# Altium PCB Voltage_Controll.PcbDoc
Units mil, origin at the board's own origin, x right, y up, seen from the top; angles counter-clockwise.
Board outline 780 x 1540 mil, 2 copper layers (Top Layer, Bottom Layer); 10 components, 46 nets, 21 pads, 4 vias.
Unrouted connection lines stored in the file: 1.
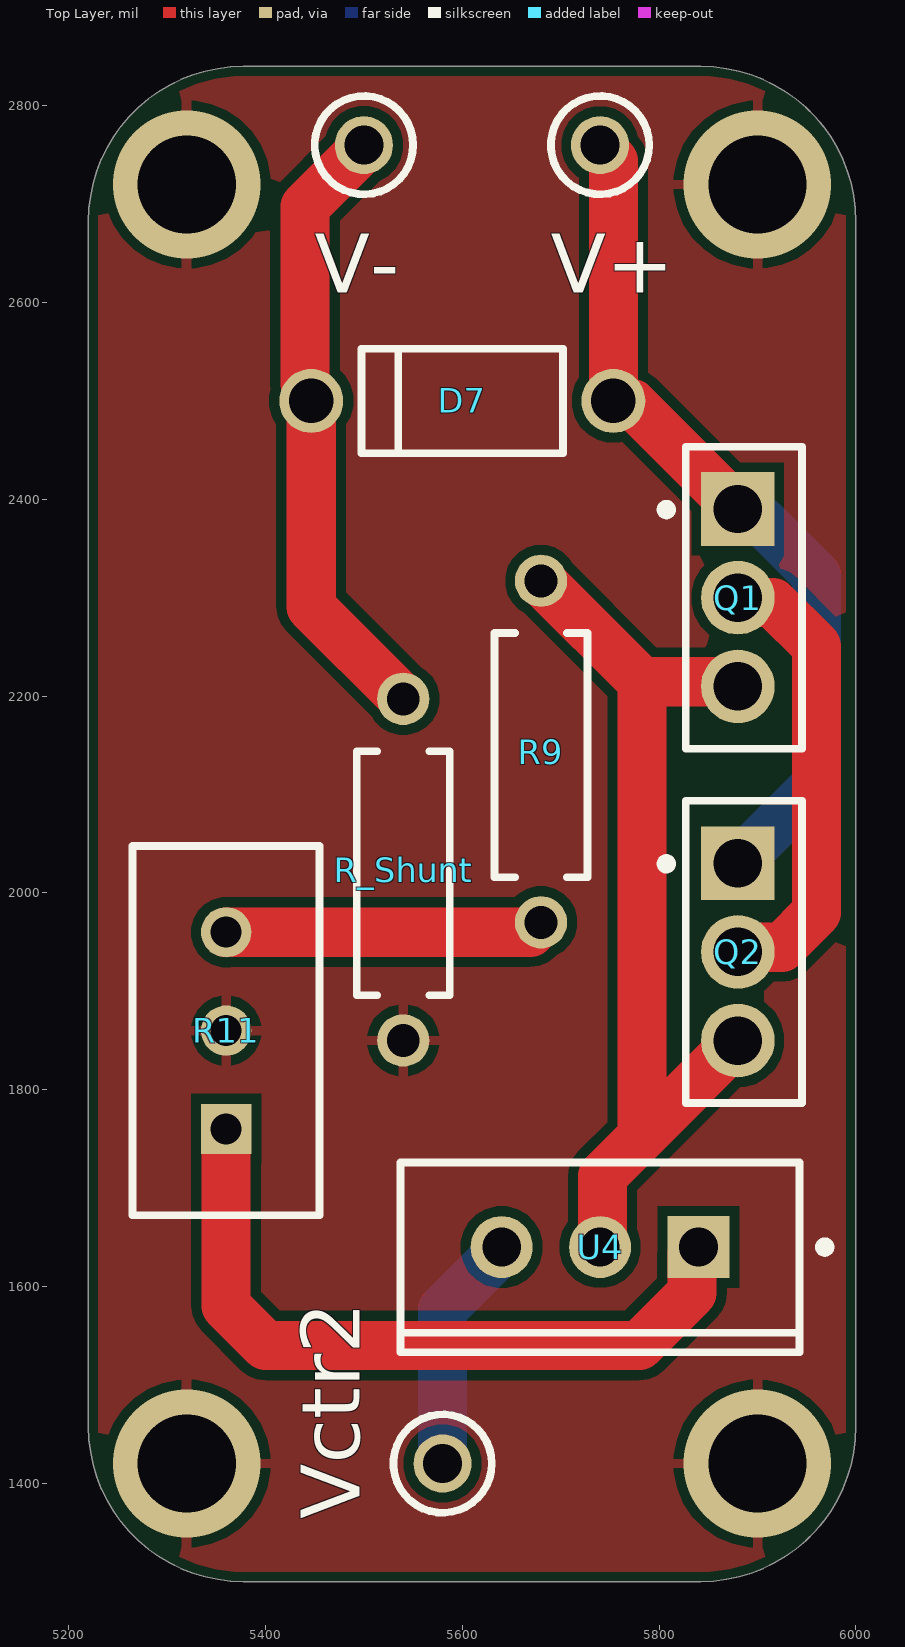
[diagram p0: Top Layer view]
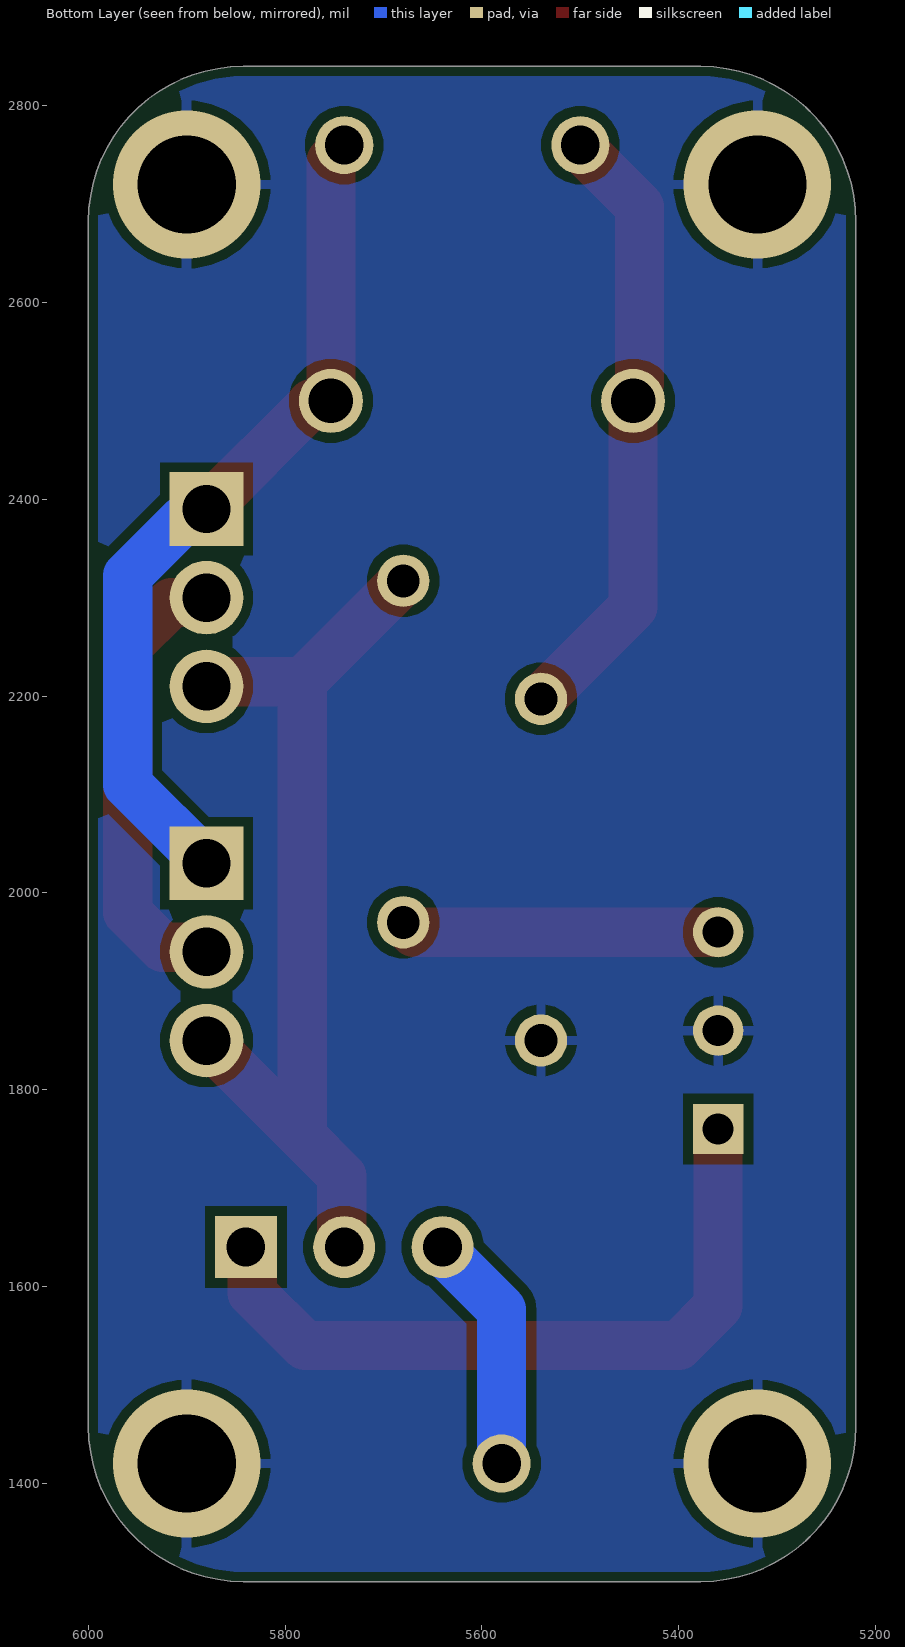
[diagram p1: Bottom Layer view, seen from below]

## Layer stack, top to bottom
Top Solder: solder mask 0.4, Solder Resist, Dk 3.5
Top Layer: signal copper 1.4
Dielectric 1: dielectric 12.6, FR-4, Dk 4.8
Bottom Layer: signal copper 1.4
Bottom Solder: solder mask 0.4, Solder Resist, Dk 3.5

## Board outline
5220,1457.48 5220,2682.52 cw(c5377.48,2682.52) 5377.48,2840 5842.52,2840 cw(c5842.52,2682.52) 6000,2682.52 6000,1457.48 cw(c5842.52,1457.48) 5842.52,1300 5377.48,1300 cw(c5377.48,1457.48)

## Design rules (kind name [scope] priority, off if disabled: settings)
BoardOutlineClearance [All] p1: gap=10 ignorepadtopadclearanceinfootprint=FALSE except(0: Arc-SplitContinuation Track-SplitContinuation SMDPad-SplitContinuation THPad-SplitContinuation Via-SplitContinuation Fill-SplitContinuation Poly-SplitContinuation Region-SplitContinuation Text-SplitContinuation)
Clearance [All] p1: gap=10 ignorepadtopadclearanceinfootprint=FALSE
PolygonConnect [All] p1: connectstyle=Relief reliefconductorwidth=10 reliefentries=4 polygonreliefangle="90 Angle" airgapwidth=10
RoutingVias [All] p1: holewidth=28 width=50 viastyle="Through Hole" minholewidth=28 minwidth=50 maxholewidth=28 maxwidth=50
SolderMaskExpansion [All] p1: expansion=4 istentingtop=FALSE
SupplyNets "Schematic Supply Nets_3" [InNet('+5V')] p1: voltage=0.000
SupplyNets "Schematic Supply Nets_2" [InNet('+9V')] p2: voltage=0.000
SupplyNets "Schematic Supply Nets_1" [InNet('GND')] p3: voltage=0.000
SupplyNets "Schematic Supply Nets" [InNet('+30V')] p4: voltage=0.000
Width [All] p1: maxlimit=100 minlimit=10 preferedwidth=20 minimp=50.000000 maximp=50.000000 favimp=50.000000
30 further rules are at their usual default settings.

## Classes and differential pairs
component class U_Voltage_Control: D7 Q1 Q2 R9 R11 R_Shunt U4

## Components (designator, comment, footprint, x,y, rotation, side; value= is the part's Value field where it differs from the comment)
D7 "1N4007" FAIR-DO-41-2 5600,2500 r180 top
Q1 "BD139G" FP-77-09-MFG 5886.1,2300 r0 top
Q2 "BD139G" FP-77-09-MFG 5886.1,1940 r0 top
R9 "MFR-25FBF52-100R" RESA60-630X240 5680,2140 r90 top value=100
R11 "3296W-1-102LF" BOUR-3296W-1-3 5360,1860 r90 top
R_Shunt "MFR-25FBF52-100R" RESA60-630X240 5540,2020 r90 top value=0.1
U4 "LM317TG" ONSC-TO-220-3-221AB-01 5740,1640 r270 top
V+ "5003" KSTN-5003 5740,2760 r90 top
V- "5003" KSTN-5003 5500,2760 r90 top
Vctr2 "5003" KSTN-5003 5580,1420 r180 top

## Footprints (in the part's own frame and the unit in brackets; to place one, negate y for a bottom-side part, rotate by r counter-clockwise, add the part's x,y. Pads: shape width x height; smd on the part's side, far side on the other; paste and mask are expansions set on the pad)
BOUR-3296W-1-3 [mm] "THD, 3-Leads, Body 9.53x4.83mm, Pitch 2.54mm"
  rect 1.3x1.3 hole 0.8: 1(-2.54,0)
  round 1.3 hole 0.8: 2(0,0) 3(2.54,0)
  silkscreen extent -4.76,-2.41 4.76,2.42, body extent -4.76,-2.41 4.76,2.42, height 11.55
FAIR-DO-41-2 [mm] "THD, 2-Leads, Body 5.2x2.72mm, Pin Spacing 7.8mm"
  round 1.65 hole 1.15: 1(-3.9,0) 2(3.9,0)
  silkscreen extent -2.6,-1.35 2.6,1.35, body extent -4.29,-1.17 4.29,1.17, height 2.35
FP-77-09-MFG [mm]
  rect 1.9x1.9 hole 1.25 paste-2539.97 mask+0: 1(-0.155,2.29)
  round 1.9 hole 1.25 paste-2539.97 mask+0: 2(-0.155,0) 3(-0.155,-2.29)
  silkscreen extent -2.12,-3.9 1.5,3.9, body extent -1.6,-4 1.6,4, height 0.25
KSTN-5003 [mm] "Test Point, Through Hole, Dia 2.54mm"
  round 1.5 hole 1: 1(0,0)
  silkscreen extent -1.27,-1.27 1.27,1.27, body extent -1.27,-1.27 1.27,1.27, height 4.57
ONSC-TO-220-3-221AB-01 [mm] "FM, 3-Leads, Body 10.3x4.85mm, Pitch 2.54mm"
  rect 1.6x1.6 hole 1: 1(0,2.54)
  round 1.6 hole 1: 2(0,0) 3(0,-2.54)
  silkscreen extent -2.18,-5.15 2.72,5.93, body extent -2.16,-5.15 2.69,5.15, height 19.68
RESA60-630X240 [mm] "Axial Resistor, 2-Leads, Dia 2.4mm, Body Length 6.3mm"
  round 1.35 hole 0.85: 1(-4.318,0) 2(4.5,0)
  silkscreen extent -3.15,-1.2 3.15,1.2, body extent -4.77,-1.19 4.77,1.2, height 2.4

## Part data
D7: library part CMP-004-00007-2, "General Purpose Rectifier, 1.1 V, 1.0 A, -55 to 175 degC, 2-Pin DO-41, RoHS, Tape and Reel", Case/Package=DO-41-2, Forward Current=1A, Forward Voltage=1.1V, Manufacturer=Fairchild, Max Operating Temperature=175°C, Max Surge Current=30A, Min Operating Temperature=-55°C, Package Description="2-Pin Axial Lead, Dia 2.375 mm, Body Length 4.63 mm", Package Quantity=5000, Package Version="Rev. 2, 09/2008", Peak Reverse Current=5uA, Datasheet URL=https://www.fairchildsemi.com/datasheets/1N/1N4007.pdf, Datasheet Version="Rev. 1.1.0, 11/2014", Elements=1, Manufacturer URL=https://www.fairchildsemi.com/, Mounting Technology=TH, Package Reference=DO-41-2, Package URL=http://www.fairchildsemi.com/dwg/DO/DO41A.pdf, Packaging=TapeandReel, Pins=2, RoHS Compliant=True
Q1 Q2: library part CMP-013-00035-1, "1.5 A, 80 V NPN Power Bipolar Junction Transistor. ONSSPCTRNSTLT1T0R;", Case/Package=TO-225, Max Operating Temperature=150°C, Min Operating Temperature=-55°C, Mounting Technology="Through Hole", Pins=3
R9 R_Shunt: library part CMP-009-00046-5, "Axial Resistor, 100 Ohm, +/- 1%, 0.25 W, -55 to 155 degC, 2-Pin THD, RoHS, Bulk", Case/Package=Axial, Manufacturer=Yageo, Max Operating Temperature=155°C, Min Operating Temperature=-55°C, Package Description="2-Pin Axial Lead, Dia 2.4 mm, Body Length 6.3 mm", Package Quantity=200, Package Reference=MFR-25, Power=250mW, Tolerance=1%, Voltage Rating=250V, Composition=CarbonFilm, Datasheet URL=http://www.yageo.com/documents/recent/Yageo%20LR_MFR_2013.pdf, Datasheet Version=Apr-13, Manufacturer URL=http://www.yageo.com/, Mounting Technology=TH, Packaging=Bulk, RoHS Compliant=True
R11: library part CMP-009-00037-2, "Square Trimpot(R) Trimming Potentiometer, 1000 Ohm, -55 to 125 degC, 3-Pin THD, RoHS, Tube", Case/Package=3296W-1-3, Manufacturer=Bourns, Max Operating Temperature=150°C, Min Operating Temperature=-55°C, Package Description="3-Pin Through Hole Device, Body 9.53 x 4.83 mm, Pitch 2.54 mm", Package Quantity=50, Power=500mW, Resistance=1k, Tolerance=10%, Voltage Rating=300V, Composition=Potentiometer, Datasheet URL=http://www.bourns.com/docs/Product-Datasheets/3296.pdf, Datasheet Version=May-16, Manufacturer URL=http://www.bourns.com/, Mounting Technology=TH, Package Reference=3296W-1-3, Packaging=Rail/Tube, RoHS Compliant=True
U4: library part CMP-019-00023-3, "Adjustable Output, Positive Voltage Regulator, 1.5 A, 0 to 125 degC, 3-Pin TO-220 (221AB-01), Pb-Free, Rail", Case/Package=TO-220, Manufacturer="ON Semiconductor", Max Input Voltage=40V, Max Operating Temperature=125°C, Max Ouput Current=1.5A, Min Input Voltage=4.2V, Min Operating Temperature=0°C, Output Voltage=1.2V, Package Description="3-Pin Flange Mount, Vertical Straight Lead, Body 9.97 x 4.445 mm, Pitch 2.54 mm", Package Quantity=50, Package Reference=TO-220-3-221AB-01, Package Version="Rev. A, 11/2010", Datasheet URL=http://www.onsemi.com/pub_link/Collateral/LM317-D.PDF, Datasheet Version="Rev. 14, 01/2016", Manufacturer URL=http://www.onsemi.com/, Mounting Technology=TH, Output Current=1.5A, Outputs=1, Packaging=Rail/Tube, Pins=3, RoHS Compliant=True
V+ V- Vctr2: library part CMP-002-00037-2, "Test Point, Orange, Height 4.6 mm, Tail Length 3 mm, 1-Pin THD, RoHS", Colour=Orange, Manufacturer=Keystone, Package Description="1-Pin Through Hole Device, Dia 2.54 mm", Package Quantity=10, Case/Package=5003, Connector Type=TestPoint, Contact Material=Bronze, Contact Plating=Tin, Datasheet URL=http://keyelco.com/userAssets/file/M65p56.pdf, Datasheet Version=Jun-15, Diameter=2.54mm, Manufacturer URL=http://www.keyelco.com/, Mounting Technology=TH, Package Reference=5003, Packaging=Bulk, Pins=1, RoHS Compliant=True

## Via types
v1: diameter 150, hole 100, Top Layer to Bottom Layer, 4 vias

## Nets (pads, with @x,y where several pads share a name; then routed paths per layer and width w, separated by ;. In a path a pad name is that pad's centre, name@x,y a point inside that pad or via, vN(x,y) a via of type N, cw(c..) or ccw(c..) an arc to the next point about the centre after c; other vN are vias at no path point)
1DQ: 
2DQ: 
+5V: 
+9V: 
+30V: Q1.2 Q2.2 | length 467.7
  Top Layer w50: Q2.2 5884.75,1944.75 5924.75,1944.75 5960,1980 5960,2250.71 5915.46,2295.25 5884.75,2295.25 Q1.2
"Ain+/timer out": 
"CC/NoCC base": 
GND: R11.2 R_Shunt.1
  other v1: 5320,1420 5900,1420 5320,2720 5900,2720
LSbase: 
Net1_1: 
Net1_2: 
Net1_6: 
Net1_7: 
Net1_8: 
Net1_9: 
Net1_13: 
Net1_14: 
Net30V2_1: 
Net*1_2: 
Net*1_3: 
NetBR1_1: 
NetBR1_4: 
NetC1_1: 
NetCC_1: 
NetD1_1: 
NetD4_2: 
NetD5_2: 
NetD6_2: 
NetD7_1: D7.1 Q1.1 Q2.1 V+.1 | length 871
  Top Layer w50: V+.1 5740,2757.55 5753.54,2744.01 D7.1 5756.41,2497.14 5773.02,2497.14 Q1.1
  Bottom Layer w50: Q2.1 5960,2110.16 5960,2322.39 5904.64,2377.76 5892.4,2377.76 Q1.1
NetD7_2: D7.2 R_Shunt.2 V-.1 | length 629.1
  Top Layer w50: V-.1 5500,2757.55 5440,2697.55 5440,2517.04 5443.59,2513.44 5443.59,2502.86 D7.2 5446.46,2290.71 R_Shunt.2
NetJ1_2: 
NetK2_1: U4.3 Vctr2.1 | length 244.9
  Bottom Layer w50: Vctr2.1 5580,1576.48 5640,1636.48 U4.3
NetK2_3: 
"NetLEDs +_1": 
NetPOT13_1: 
NetPOT13_2: 
NetQ1_3: Q1.3 Q2.3 R9.2 U4.2 | length 974.5
  Top Layer w50: R9.2 5782.58,2214.59 ; U4.2 5742.49,1642.49 5742.49,1712.33 5782.58,1752.42 ; Q2.3 5782.58,1752.42 ; Q1.3 5875.25,2214.59 5782.58,2214.59 ; 5782.58,1752.42 5782.58,2214.59
NetQ4_2: 
NetQ5_2: 
NetQ6_2: 
NetR9_1: R9.1 R11.1 R11.3 U4.1 | length 1065.6
  Top Layer w50: R11.1 5360,1580 5400,1540 5780,1540 5833.5,1593.5 5833.5,1633.5 U4.1 ; R11.3 5669.15,1960 5679.15,1970 R9.1
NetR10_1: 
NetR12_1: 
NetR21_2: 
ThermRef: 
THR-DIS: 

## Polygon pours and split planes (outlines as drawn)
GND on Bottom Layer "NONET_L-01_P-001" (solid, remove dead copper, pour order 1): 5180,2880 5180,1280 6060,1280 6060,2880
GND on Top Layer "NONET_L-01_P-001" (solid, remove dead copper, pour order 0): 5171.95,2873.38 5171.95,1273.38 6051.95,1273.38 6051.95,2873.38

## Silkscreen, mask and mechanical layers (free items; w line width, h text height)
Mechanical 1:
  the board outline again, w10